# Altium PCB PCB_ISB_V2.PcbDoc
Units mm, origin at the board's own origin, x right, y up, seen from the top; angles counter-clockwise.
Board outline 90.04 x 30.35 mm, 2 copper layers (Top Layer, Bottom Layer); 29 components, 28 nets, 115 pads, 14 vias.
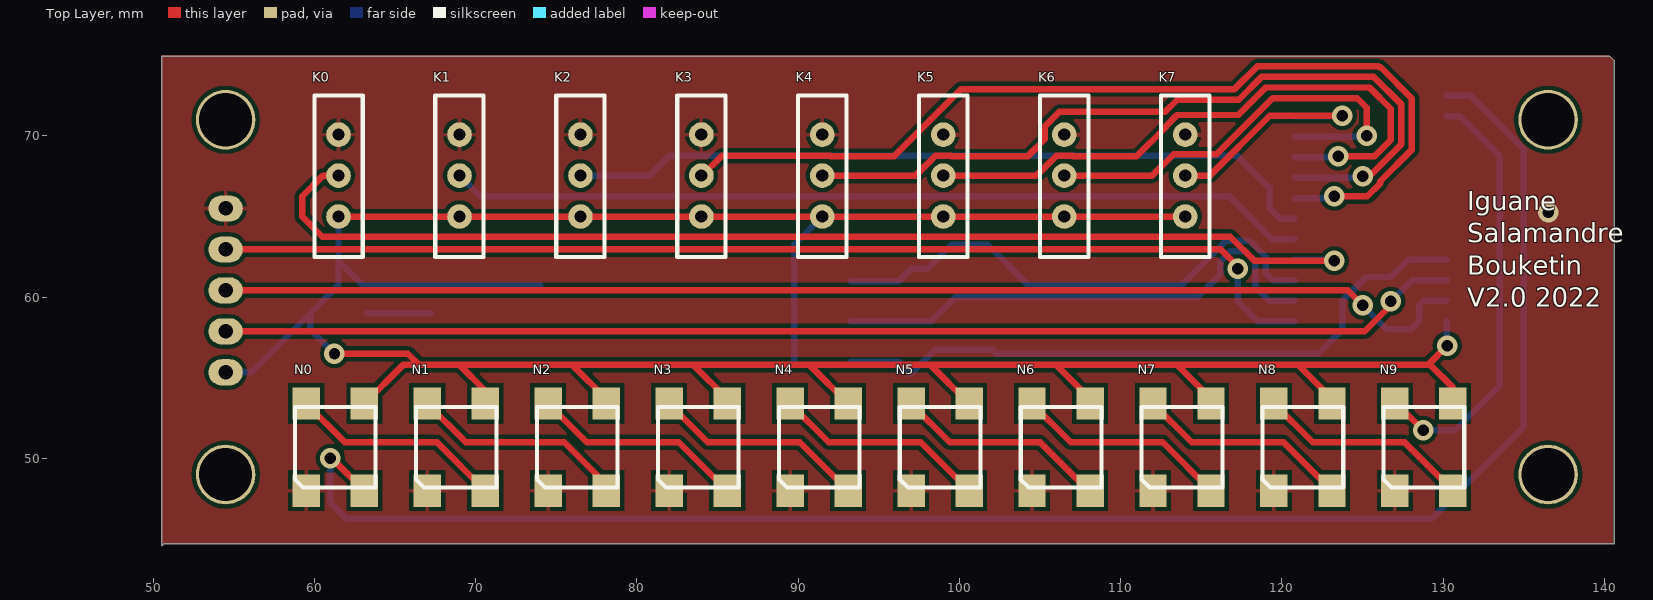
[diagram p0: Top Layer view]
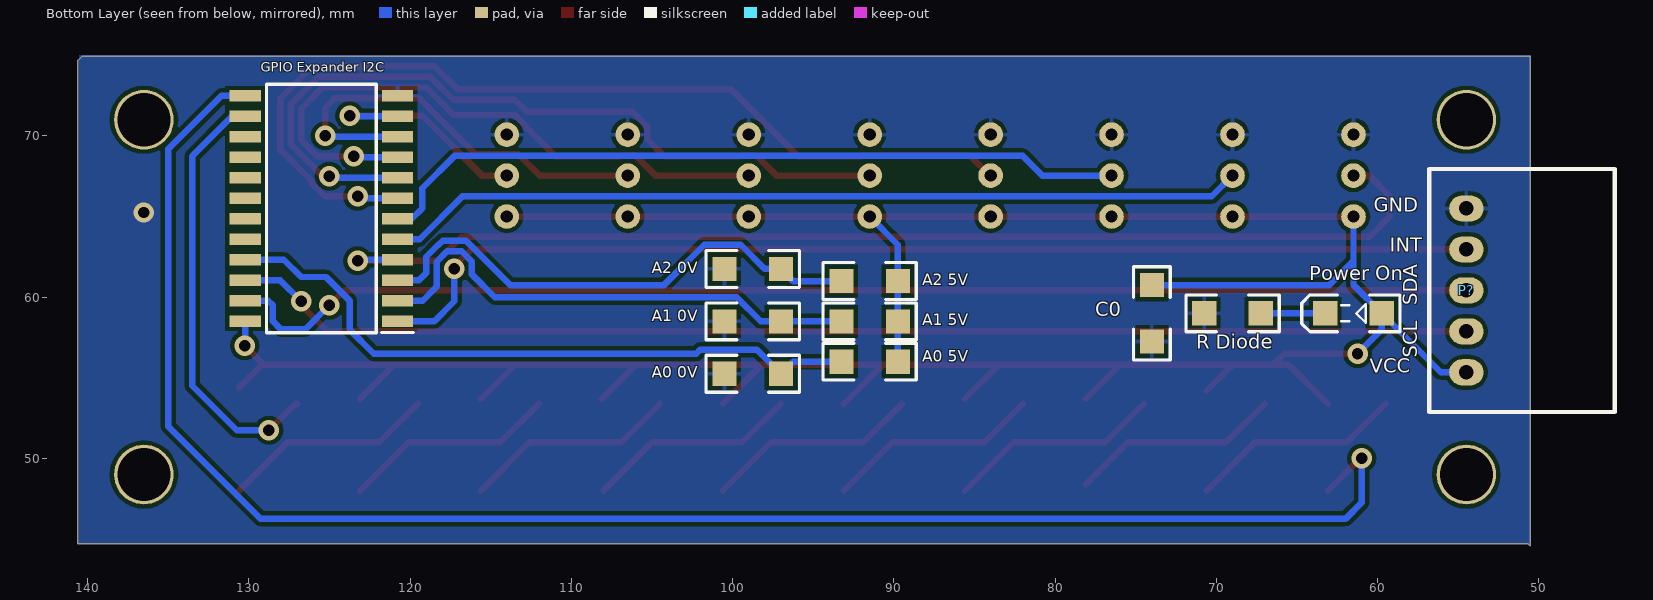
[diagram p1: Bottom Layer view, seen from below]
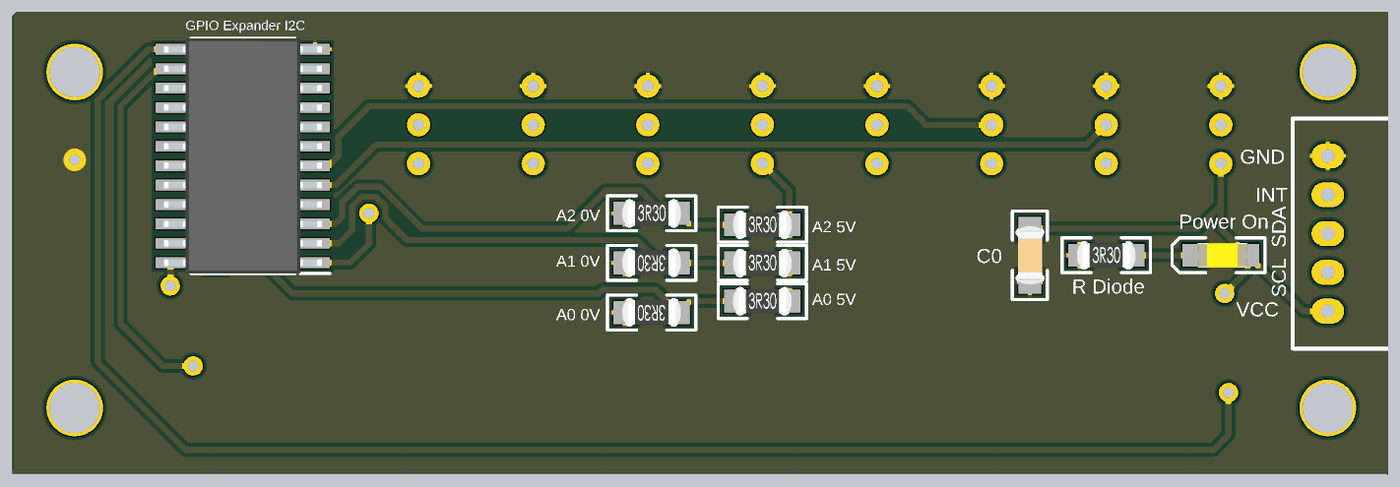
[diagram p2: 3D render of the assembled board from below, using the file's embedded part models]

## Layer stack, top to bottom
Top Solder: solder mask 0.0102, Solder Resist, Dk 3.5
Top Layer: signal copper 0.0356
Dielectric 1: dielectric 0.32, FR-4, Dk 4.8
Bottom Layer: signal copper 0.0356
Bottom Solder: solder mask 0.0102, Solder Resist, Dk 3.5

## Board outline
50.546,44.577 50.673,44.704 140.589,44.704 140.589,74.676 140.335,74.93 50.546,74.93 50.546,44.577

## Design rules (kind name [scope] priority, off if disabled: settings)
Clearance [All] p1: gap=0.254
PolygonConnect [All] p1: connectstyle=Relief reliefconductorwidth=0.254 reliefentries=4 polygonreliefangle="90 Angle" airgapwidth=0.254
RoutingVias [All] p1: holewidth=0.711 width=1.27 viastyle="Through Hole" minholewidth=0.711 minwidth=1.27 maxholewidth=0.711 maxwidth=1.27
SolderMaskExpansion [All] p1: expansion=0.102
Width [All] p1: maxlimit=3 minlimit=0.254 preferedwidth=0.4
30 further rules are at their usual default settings.

## Components (designator, comment, footprint, x,y, rotation, side; value= is the part's Value field where it differs from the comment)
"A0 0V" "Res2" "Resistor 1206" 98.75,55.25 r0 bottom (schematic designator "R0 0V")
"A0 5V" "Res2" "Resistor 1206" 91.5,56 r180 bottom (schematic designator "R0 5V")
"A1 0V" "Res2" "Resistor 1206" 98.75,58.5 r0 bottom (schematic designator "R0 0V")
"A1 5V" "Res2" "Resistor 1206" 91.5,58.5 r180 bottom (schematic designator "R0 5V")
"A2 0V" "Res2" "Resistor 1206" 98.75,61.75 r180 bottom (schematic designator "R0 0V")
"A2 5V" "Res2" "Resistor 1206" 91.5,61 r180 bottom (schematic designator "R0 5V")
C0 "Cap" "Capacitor 1206" 74,59 r90 bottom
"GPIO Expander I2C" "PCA9555D,118" SOIC127P1032X265-24N 125.5,65.5 r0 bottom (schematic designator IC?)
K0 "Switch" SWITCH 61.5,65 r90 top
K1 "Switch" SWITCH 69,65 r90 top
K2 "Switch" SWITCH 76.5,65 r90 top
K3 "Switch" SWITCH 84,65 r90 top
K4 "Switch" SWITCH 91.5,65 r90 top
K5 "Switch" SWITCH 99,65 r90 top
K6 "Switch" SWITCH 106.5,65 r90 top
K7 "Switch" SWITCH 114,65 r90 top
N0 "" Neopixel 59.5,48 r90 top
N1 "" Neopixel 67,48 r90 top
N2 "" Neopixel 74.5,48 r90 top
N3 "" Neopixel 82,48 r90 top
N4 "" Neopixel 89.5,48 r90 top
N5 "" Neopixel 97,48 r90 top
N6 "" Neopixel 104.5,48 r90 top
N7 "" Neopixel 112,48 r90 top
N8 "" Neopixel 119.5,48 r90 top
N9 "" Neopixel 127,48 r90 top
P? "Header 5" "JST-XH 5" 54.5,65.5 r270 bottom
"Power On" "5V_L" KP-3216SEC 61.5,59 r0 bottom
"R Diode" "Res2" "Resistor 1206" 69,59 r180 bottom (schematic designator R1)

## Footprints (in the part's own frame and the unit in brackets; to place one, negate y for a bottom-side part, rotate by r counter-clockwise, add the part's x,y. Pads: shape width x height; smd on the part's side, far side on the other; paste and mask are expansions set on the pad)
"Capacitor 1206" [mm]
  rect 1.5x1.5 smd: 1(-1.75,0) 2(1.75,0)
  silkscreen extent -2.89,-1.14 2.89,1.14, body extent -1.98,-0.99 1.98,0.96, height 1.3
"JST-XH 5" [mm]
  oval 1.624x2.132 hole 0.9: 1(0,0) 2(2.54,0) 3(5.08,0) 4(7.62,0) 5(10.16,0)
  silkscreen extent -2.45,-2.3 12.61,9.2
KP-3216SEC [mm]
  rect 1.5x1.5 smd: 1(-1.75,0) 2(1.75,0)
  silkscreen extent -2.89,-1.14 3.2,1.14, body extent -1.7,-0.79 1.5,0.81, height 1.1
Neopixel [mm]
  rect 2x1.7 smd: 1(5.4,0) 2(0,0) 3(0,-3.6) 4(5.4,-3.6)
  silkscreen extent 0.2,-4.3 5.2,0.7, body extent 0.19,-4.33 5.19,0.67, height 2
"Resistor 1206" [mm]
  rect 1.5x1.5 smd: 1(-1.75,0) 2(1.75,0)
  silkscreen extent -2.89,-1.14 2.89,1.14, body extent -1.98,-0.95 1.98,0.93, height 0.55
SOIC127P1032X265-24N [mm]
  rect 1.95x0.7 smd: 1(-4.725,6.985) 2(-4.725,5.715) 3(-4.725,4.445) 4(-4.725,3.175) 5(-4.725,1.905) 6(-4.725,0.635) 7(-4.725,-0.635) 8(-4.725,-1.905) 9(-4.725,-3.175) 10(-4.725,-4.445) 11(-4.725,-5.715) 12(-4.725,-6.985) 13(4.725,-6.985) 14(4.725,-5.715) 15(4.725,-4.445) 16(4.725,-3.175) 17(4.725,-1.905) 18(4.725,-0.635) 19(4.725,0.635) 20(4.725,1.905) 21(4.725,3.175) 22(4.725,4.445) 23(4.725,5.715) 24(4.725,6.985)
  silkscreen extent -5.7,-7.7 3.4,7.7, body extent -5.16,-7.7 5.16,7.7, height 2.65
SWITCH [mil] "2 pos switch,  09.03290.01"
  round 60 hole 30: 0(0,0) 1(100,0) 2(200,0)
  silkscreen extent -98,-59 295,59, body extent -98,-59 295,59, height 291

## Part data
"A0 0V" "A0 5V" "A1 0V" "A1 5V" "A2 0V" "A2 5V" "R Diode": "Resistor"
C0: "Capacitor"
"GPIO Expander I2C": "Integrated Circuit"
K0 K1 K2 K3 K4 K5 K6 K7: "3 pos switch, 09.03290.01"
N0 N1 N2 N3 N4 N5 N6 N7 N8 N9: library part NeoPixel
P?: "Header, 5-Pin"
"Power On": library part LED2, "Typical RED, GREEN, YELLOW, AMBER GaAs LED"

## Free pads (board coordinates)
  round 3.7 hole 3.3: Vis(54.5,49) Vis(54.5,71) Vis(136.5,49) Vis(136.5,71)

## Via types
v1: diameter 1.27, hole 0.711, Top Layer to Bottom Layer, 14 vias

## Nets (pads, with @x,y where several pads share a name; then routed paths per layer and width w, separated by ;. In a path a pad name is that pad's centre, name@x,y a point inside that pad or via, vN(x,y) a via of type N, cw(c..) or ccw(c..) an arc to the next point about the centre after c; other vN are vias at no path point)
GND: "A0 0V.2" "A1 0V.2" "A2 0V.1" "GPIO Expander I2C.12" "R Diode.1" C0.1 K0.2 K1.2 K2.2 K3.2 K4.2 K5.2 K6.2 K7.2 N0.2 N1.2 N2.2 N3.2 N4.2 N5.2 N6.2 N7.2 N8.2 N9.2 P?.1
  other v1: 136.5,65.25
NetIC?_1: "GPIO Expander I2C.1" P?.2 | length 69.2
  Top Layer w0.4: P?.2 116.21,62.96 v1@117.25,61.92
  Bottom Layer w0.4: v1(117.25,61.75) 117.25,59.75 118.485,58.515 120.775,58.515
NetIC?_2: "A1 0V.1" "A1 5V.1" "GPIO Expander I2C.2" | length 32
  Bottom Layer w0.4: 93.25,58.5 97,58.5 98.25,58.5 99.75,60 114.75,60 116.161,61.411 116.161,62.201 116.799,62.839 117.701,62.839 118.339,62.201 118.339,60.661 119.215,59.785 120.775,59.785
NetIC?_3: "A2 0V.2" "A2 5V.1" "GPIO Expander I2C.3" | length 32.2
  Bottom Layer w0.4: 93.25,61 96.25,61 97,61.75 98,61.75 99.5,63.25 101.75,63.25 104.25,60.75 113.785,60.75 116.528,63.493 117.972,63.493 118.215,63.25 118.25,63.25 119,62.5 119,61.5 119.445,61.055 120.775,61.055
NetIC?_4: "GPIO Expander I2C.4" K0.1 | length 71.7
  Top Layer w0.4: K0.1 60.54,67.54 59.25,66.25 59.25,65 60.5,63.75 116.79,63.75 118.29,62.25 v1(123.25,62.25)
  Bottom Layer w0.4: 120.775,62.325 123.175,62.325 v1(123.25,62.25)
NetIC?_5: "GPIO Expander I2C.5" K1.1 | length 53.4
  Bottom Layer w0.4: K1.1 70.29,66.25 116.75,66.25 119.405,63.595 120.775,63.595
NetIC?_6: "GPIO Expander I2C.6" K2.1 | length 47.1
  Bottom Layer w0.4: K2.1 80.79,67.54 82.006,68.756 117.244,68.756 119.25,66.75 119.25,65.5 119.885,64.865 120.775,64.865
NetIC?_7: "GPIO Expander I2C.7" K3.1 | length 59.6
  Top Layer w0.4: K3.1 84,67.5 85.256,68.756 92.004,68.756 92.01,68.75 95.95,68.75 100.104,72.904 117.054,72.904 118.458,74.308 125.967,74.308 126.025,74.25 126.116,74.25 128.058,72.308 128.058,69.15 126.089,67.181 126.089,67.049 125.29,66.25 v1(123.25,66.25) v1@123.411,66.411
  Bottom Layer w0.4: 120.775,66.135 v1@123.135,66.135
NetIC?_8: "GPIO Expander I2C.8" K4.1 | length 49.4
  Top Layer w0.4: K4.1 97.28,67.54 98.496,68.756 99.504,68.756 99.51,68.75 104.25,68.75 105.284,69.784 105.284,70.584 106.2,71.5 112.75,71.5 113.5,72.25 117.325,72.25 118.729,73.654 125.696,73.654 127.404,71.946 127.404,69.479 125.425,67.5 v1(125,67.5)
  Bottom Layer w0.4: 120.775,67.405 v1@124.905,67.405
NetIC?_9: "GPIO Expander I2C.9" K5.1 | length 38.8
  Top Layer w0.4: K5.1 104.78,67.54 105.996,68.756 107.004,68.756 107.01,68.75 111,68.75 112.784,70.534 112.784,70.584 113.496,71.296 117.296,71.296 119,73 125.425,73 126.75,71.675 126.75,69.75 125.75,68.75 v1(123.5,68.75)
  Bottom Layer w0.4: 120.775,68.675 v1@123.425,68.675
NetIC?_10: "GPIO Expander I2C.10" K6.1 | length 27.2
  Top Layer w0.4: K6.1 111.96,67.54 113.284,68.864 115.939,68.864 119.414,72.339 124.661,72.339 125.25,71.75 v1(125.25,70)
  Bottom Layer w0.4: 120.775,69.945 125.195,69.945 v1(125.25,70)
NetIC?_11: "GPIO Expander I2C.11" K7.1 | length 14.3
  Top Layer w0.4: K7.1 115.54,67.54 119.25,71.25 v1(123.75,71.25)
  Bottom Layer w0.4: 120.775,71.215 123.715,71.215 v1(123.75,71.25)
NetIC?_13: "GPIO Expander I2C.13" N0.3 | length 105.8
  Top Layer w0.4: v1(61,50) 61.1,50 N0.3
  Bottom Layer w0.4: v1(61,50) 61,47.25 62,46.25 129.25,46.25 135,52 135,69.175 131.69,72.485 130.225,72.485
NetIC?_14: "GPIO Expander I2C.14" N9.1 | length 26.9
  Top Layer w0.4: N9.1 127.1,53.4 v1(128.75,51.75)
  Bottom Layer w0.4: v1(128.75,51.75) 130.75,51.75 133.5,54.5 133.5,68.75 131.035,71.215 130.225,71.215
NetIC?_21: "A0 0V.1" "A0 5V.1" "GPIO Expander I2C.21" | length 41.5
  Bottom Layer w0.4: 93.25,56 96.25,56 97,55.25 98.5,56.75 102,56.75 102.25,56.5 122.25,56.5 123.75,58 123.75,59.79 125.21,61.25 126.75,61.25 127.825,62.325 130.225,62.325
NetIC?_22: "GPIO Expander I2C.22" P?.4 | length 76.9
  Top Layer w0.4: P?.4 125.13,57.88 v1@126.75,59.5
  Bottom Layer w0.4: v1(126.75,59.75) 128.055,61.055 130.225,61.055
NetIC?_23: "GPIO Expander I2C.23" P?.3 | length 78.1
  Top Layer w0.4: P?.3 124.08,60.42 v1(125,59.5)
  Bottom Layer w0.4: v1(125,59.5) 126.5,58 128,58 128.5,58.5 128.5,59.5 128.785,59.785 130.225,59.785
NetN0_1: N0.1 N1.3 | length 13.3
  Top Layer w0.4: N0.1 61.9,51 67.6,51 N1.3
NetN1_1: N1.1 N2.3 | length 13.2
  Top Layer w0.4: N1.1 69.4,51 75.5,51 N2.3@78.1,48.4
NetN2_1: N2.1 N3.3 | length 13.3
  Top Layer w0.4: N2.1 76.9,51 82.6,51 N3.3
NetN3_1: N3.1 N4.3 | length 13.3
  Top Layer w0.4: N3.1 84.4,51 90.1,51 N4.3
NetN4_1: N4.1 N5.3 | length 13.3
  Top Layer w0.4: N4.1 91.9,51 97.6,51 N5.3
NetN5_1: N5.1 N6.3 | length 13.2
  Top Layer w0.4: N5.1 99.4,51 105,51 N6.3@108,48
NetN6_1: N6.1 N7.3 | length 13.3
  Top Layer w0.4: N6.1 106.9,51 112.6,51 N7.3
NetN7_1: N7.1 N8.3 | length 13.3
  Top Layer w0.4: N7.1 114.4,51 120.1,51 N8.3
NetN8_1: N8.1 N9.3 | length 13.3
  Top Layer w0.4: N8.1 121.9,51 127.6,51 N9.3
"NetPower On_2": "Power On.2" "R Diode.2" | length 4
  Bottom Layer w0.4: 63.25,59 67.25,59
VCC: "A0 5V.2" "A1 5V.2" "A2 5V.2" "GPIO Expander I2C.24" "Power On.1" C0.2 K0.0 K1.0 K2.0 K3.0 K4.0 K5.0 K6.0 K7.0 N0.4 N1.4 N2.4 N3.4 N4.4 N5.4 N6.4 N7.4 N8.4 N9.4 P?.5 | length 193.7
  Top Layer w0.4: v1(61.25,56.5) 65.8,56.5 66.5,55.8 ; K0.0 K1.0 K2.0 K3.0 K4.0 K5.0 K6.0 K7.0 ; N0.4 65.5,55.8 66.5,55.8 ; N1.4@70.6,54.2 69,55.8 ; N2.4@78.1,53.7 76,55.8 ; N3.4@85.6,53.7 83.5,55.8 ; N4.4 90.7,55.8 ; N5.4 98.2,55.8 ; N6.4@108.1,53.7 106,55.8 ; N7.4@115.6,53.7 113.5,55.8 ; N8.4@123.1,53.7 121,55.8 ; v1(130.25,57) 129.05,55.8 ; 130.6,54.4 129.2,55.8 129.05,55.8 ; 66.5,55.8 69,55.8 ; 69,55.8 76,55.8 ; 76,55.8 83.5,55.8 ; 83.5,55.8 90.7,55.8 ; 90.7,55.8 98.2,55.8 ; 98.2,55.8 106,55.8 ; 106,55.8 113.5,55.8 ; 113.5,55.8 121,55.8 ; 121,55.8 129.05,55.8
  Bottom Layer w0.4: P?.5 56.09,55.34 59.75,59 ; v1(61.25,56.5) 59.75,58 59.75,59 ; K0.0 61.5,62.25 ; C0.2 63,60.75 61.5,62.25 ; 89.75,56 89.75,58.5 89.75,61 89.75,63.25 K4.0 ; v1@130.225,57.025 130.225,58.515 ; 59.75,59 61.5,60.75 61.5,62.25
pads on no net: "GPIO Expander I2C.15" "GPIO Expander I2C.16" "GPIO Expander I2C.17" "GPIO Expander I2C.18" "GPIO Expander I2C.19" "GPIO Expander I2C.20"

## Polygon pours and split planes (outlines as drawn)
GND on Top Layer "GND_plane" (solid, remove dead copper, pour order 0): 50.5,44.75 50.5,75 140.25,75 140.5,74.75 140.5,44.75
GND on Bottom Layer "GND_plane" (solid, remove dead copper, pour order 2): 50.5,44.75 50.5,75 140.5,75 140.5,45 140.75,44.75

## Silkscreen, mask and mechanical layers (free items; w line width, h text height)
Top Overlay:
  text "Iguane / Salamandre / Bouketin / V2.0 2022" at 131.5,59 h2
Bottom Overlay:
  text "GND" at 60.25,65 h1.5
  text "INT" at 59.25,62.5 h1.5
  text "SDA" at 57.25,59.5 h1.5 r270
  text "SCL" at 57.25,56.25 h1.5 r270
  text "VCC" at 60.5,55 h1.5
Mechanical 1:
  the board outline again, w1.2